# Altium PCB LM2596_5V_BuckConverter_v1.0-copy_2024-10-14.pcbdoc
Units mil, origin at the board's own origin, x right, y up, seen from the top; angles counter-clockwise.
Board outline 2600 x 2200 mil, 2 copper layers (Top Layer, Bottom Layer); 9 components, 4 nets, 18 pads, 84 vias.
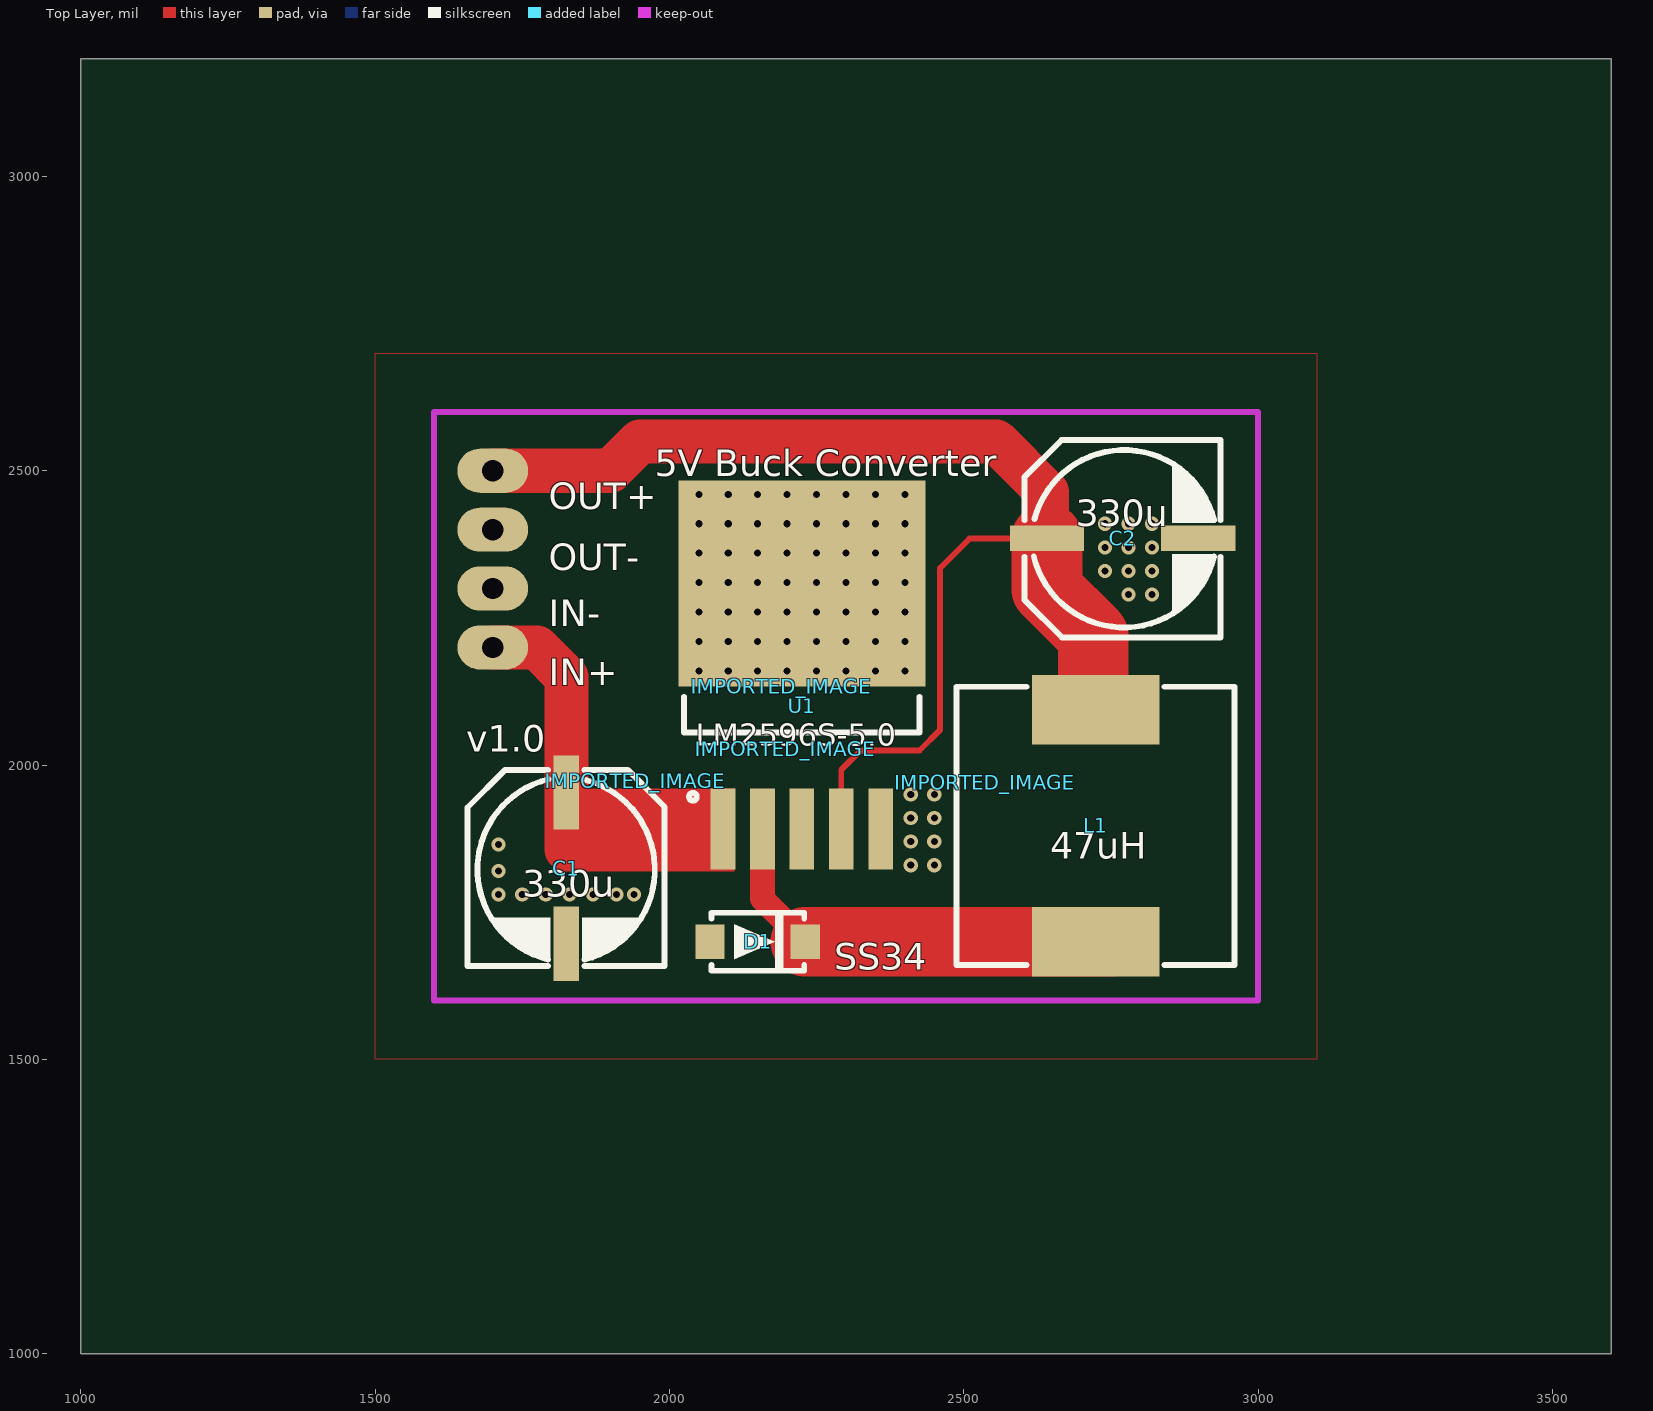
[diagram p0: Top Layer view]
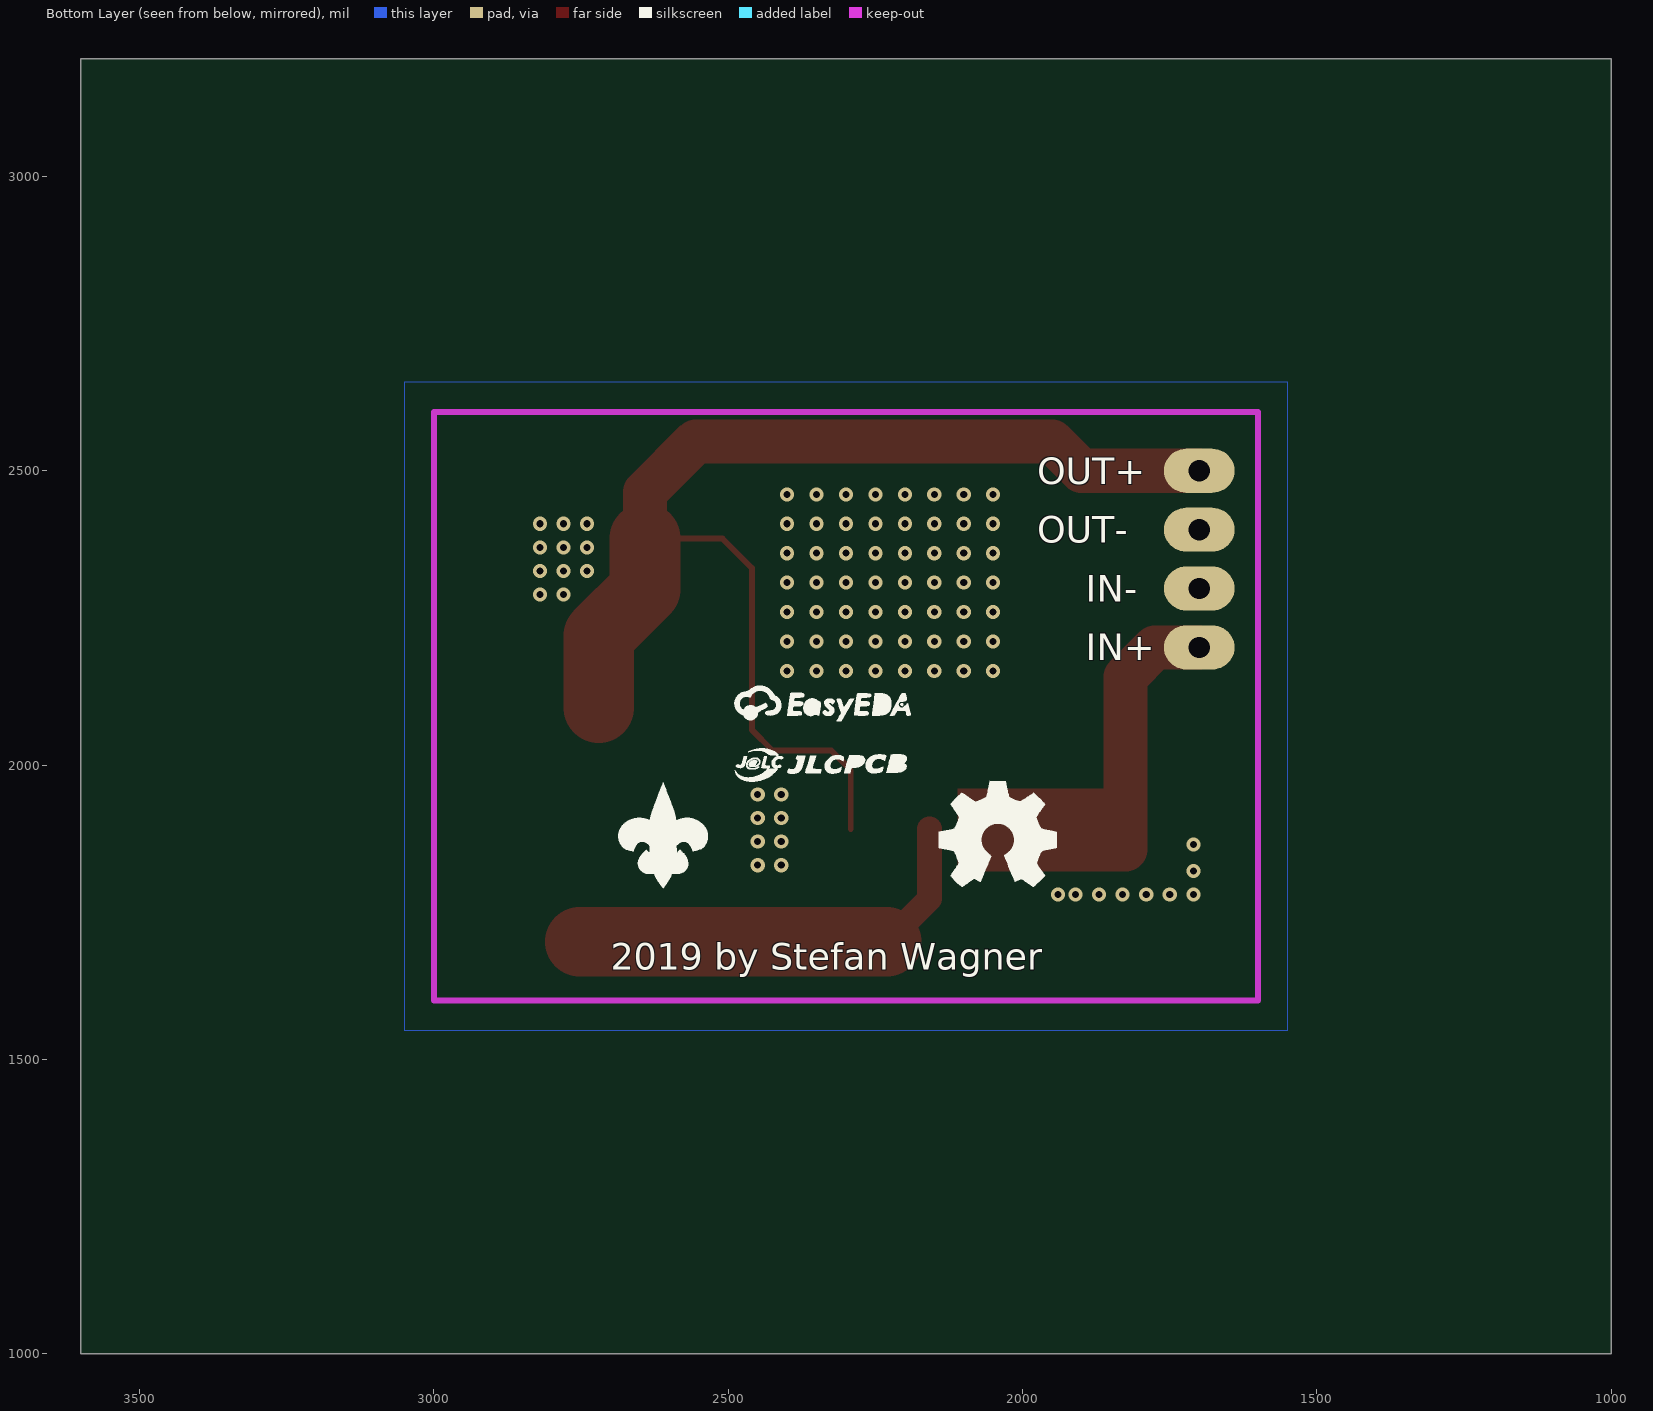
[diagram p1: Bottom Layer view, seen from below]

## Layer stack, top to bottom
Top Layer: signal copper (thickness not stored)
Dielectric: dielectric 12.6, FR-4, Dk 4.8
Bottom Layer: signal copper (thickness not stored)

## Board outline
3600,1000 1000,1000 1000,3200 3600,3200

## Components (designator, comment, footprint, x,y, rotation, side; value= is the part's Value field where it differs from the comment)
C1 "330u" CAP-D8.0XH10.5 1825,1825 r90 top
C2 "330u" CAP-D8.0XH10.5 2770,2385 r180 top
D1 "SS34" SMA(DO-214AC) 2150,1700 r0 top
IMPORTED_IMAGE "IMPORTED_IMAGE" IMPORTED_IMAGE 2535.85,1970.61 r0 top
IMPORTED_IMAGE "IMPORTED_IMAGE" IMPORTED_IMAGE 1941.58,1973.23 r0 top
IMPORTED_IMAGE "IMPORTED_IMAGE" IMPORTED_IMAGE 2190,2133.66 r0 top
IMPORTED_IMAGE "IMPORTED_IMAGE" IMPORTED_IMAGE 2196.94,2027.97 r0 top
L1 "47uH" IND-SMD_L12.0-W12.0_CDRH127NP 2724,1897 r270 top
U1 "LM2596S-5.0" TO-263-5_L10.6-W9.6-P1.70-LS15.9-BR 2225,2100 r270 top

## Footprints (in the part's own frame and the unit in brackets; to place one, negate y for a bottom-side part, rotate by r counter-clockwise, add the part's x,y. Pads: shape width x height; smd on the part's side, far side on the other; paste and mask are expansions set on the pad)
CAP-D8.0XH10.5 [mm]
  rect 3.2x1.1 smd paste+0 mask+0.102: 1(3.264,0) 2(-3.264,0)
  silkscreen extent -4.23,-4.24 4.24,4.27
IMPORTED_IMAGE [mil]
IND-SMD_L12.0-W12.0_CDRH127NP [mm]
  rect 3x5.5 smd paste+0 mask+0.102: 1(-5,0) 2(5,0)
  silkscreen extent -6,-6 6,6
SMA(DO-214AC) [mil]
  rect 50x57.9 smd paste+0 mask+4: 1(-81,0) 2(81,0)
  silkscreen extent -78,-49 79,49
TO-263-5_L10.6-W9.6-P1.70-LS15.9-BR [mm]
  rect 3.5x1.069 smd paste+0 mask+0.102: 1(5.3,-3.404) 2(5.3,-1.702) 3(5.3,0) 4(5.3,1.702) 5(5.3,3.404)
  rect 8.89x10.66 smd paste+0 mask+0.102: 6(-5.3,0)
  silkscreen extent -0.41,-5.08 4.07,5.08

## Free pads (board coordinates)
  oval 120x75 hole 36 paste+0 mask+4: 1(1700,2200) 2(1700,2300) 3(1700,2400) 4(1700,2500)

## Via types
v1: diameter 24, hole 12, Top Layer to Bottom Layer, tented both sides, 84 vias

## Nets (pads, with @x,y where several pads share a name; then routed paths per layer and width w, separated by ;. In a path a pad name is that pad's centre, name@x,y a point inside that pad or via, vN(x,y) a via of type N, cw(c..) or ccw(c..) an arc to the next point about the centre after c; other vN are vias at no path point)
+5V: C2.1 L1.1 pad.4 U1.4 | length 2170.3
  Top Layer w10: U1.4 2292,1992 2325,2025 2425,2025 2460,2060 2460,2335 2510,2385 C2.1
  Top Layer w75: pad.4 1900,2500 1950,2550 2555,2550 2641.5,2463.5 C2.1
  Top Layer w120: C2.1 2641.5,2298.5 2720,2220 L1.1@2720,2097.85
GND: C1.2 C2.2 D1.1 pad.2 pad.3 U1.3 U1.5 U1.6
  other v1: 1710,1780 1750,1780 1790,1780 1830,1780 1870,1780 1910,1780 1940,1780 1710,1820 2410,1830 2450,1830 1710,1865 2410,1870 2450,1870 2410,1910 2450,1910 2410,1950 2450,1950 2050,2160 2100,2160 2150,2160 2200,2160 2250,2160 2300,2160 2350,2160 2400,2160 2050,2210 2100,2210 2150,2210 2200,2210 2250,2210 2300,2210 2350,2210 2400,2210 2050,2260 2100,2260 2150,2260 2200,2260 2250,2260 2300,2260 2350,2260 2400,2260 2780,2290 2820,2290 2050,2310 2100,2310 2150,2310 2200,2310 2250,2310 2300,2310 2350,2310 2400,2310 2740,2330 2780,2330 2820,2330 2050,2360 2100,2360 2150,2360 2200,2360 2250,2360 2300,2360 2350,2360 2400,2360 2740,2370 2780,2370 2820,2370 2050,2410 2100,2410 2150,2410 2200,2410 2250,2410 2300,2410 2350,2410 2400,2410 2740,2410 2780,2410 2820,2410 2050,2460 2100,2460 2150,2460 2200,2460 2250,2460 2300,2460 2350,2460 2400,2460
U1_2: D1.2 L1.2 U1.2 | length 742.6
  Top Layer w42: U1.2 2158,1773 D1.2
  Top Layer w118: D1.2 L1.2@2752,1700.1
VIN: C1.1 pad.1 U1.1 | length 438.7
  Top Layer w75: pad.1 1775,2200 1825,2150 C1.1 1825,1857

## Polygon pours and split planes (outlines as drawn)
GND on Bottom Layer (solid): 1550,2650 3050,2650 3050,1550 1550,1550
GND on Top Layer (solid): 1500,2700 3100,2700 3100,1500 1500,1500

## Other copper
Top Layer:
  region net VIN: 2110,1960 2110,1820 1825,1820 1825,1960 2110,1960

## Silkscreen, mask and mechanical layers (free items; w line width, h text height)
Top Overlay:
  text "5V Buck Converter" at 1975,2491 h45
  text "OUT+" at 1795,2434.5 h45
  text "OUT-" at 1795,2331 h45
  text "IN-" at 1795,2236 h45
  text "IN+" at 1795,2136 h45
  text "v1.0" at 1655,2022.5 h45
Bottom Overlay:
  text "OUT+" at 1975,2477.5 h45
  text "OUT-" at 1975,2377.5 h45
  text "IN-" at 1892.45,2277.95 h45
  text "IN+" at 1892.45,2177.95 h45
  text "2019 by Stefan Wagner" at 2700,1652.5 h45
Document:
  lines w0.1: 2299.99,2099.99 2300.01,2100.01